# EAGLE board ThingPlus_Micromod-MiddleJig (EAGLE 9.6.2)

Size 104.14 x 35.56 mm. Coordinates in mm from the lower left corner, seen from the top.
Outline: 0,33.02 arc-80 2.54,35.56 101.6,35.56 arc-80 104.14,33.02 104.14,2.54 arc-80 101.6,0 2.54,0 arc-80 0,2.54 0,33.02
Outline: 12.83,8.25 15.37,8.25 15.37,20.95 20.7,20.95 20.7,28.83 10.92,28.83 10.92,20.07 6.98,20.07 6.98,15.49 10.67,15.49 10.67,11.43 12.83,11.43 12.83,8.25
Outline: 27.18,18.67 36.45,18.67 36.45,14.22 27.18,14.22 27.18,18.67
Outline: 45.47,23.88 51.69,23.88 51.69,19.3 45.47,19.3 45.47,23.88
Outline: 89.92,23.49 92.71,23.49 92.71,19.69 89.92,19.69 89.92,6.86 74.04,6.86 74.04,24.38 69.72,24.38 69.72,27.43 74.04,27.43 74.04,31.88 89.92,31.88 89.92,23.49
Copper layers (1*16): Top 0.035mm / dielectric 1.5mm / Bottom 0.035mm
Design rules "SparkFun-2-Layer-General-JLCPCB": minimum track width 7mil, minimum drill 0.3mm, track to track 7mil, track to pad 7mil, pad to pad 7mil, via to via 7mil, smd to smd 7mil, copper to edge 7mil, drill to drill 7mil, minimum pad ring 7mil, minimum via ring 7mil, stop-mask expansion 4mil, vias tented up to drill 25mil, thermal gap 10mil
Net classes: 0 default: width 0 mm, drill 0 mm; 1 power: width 0.457 mm
Holes 1.7 mm at 22.61,16.76 20.07,16.76 92.33,13.84 58.42,7.62 55.88,7.62 53.34,7.62 50.8,7.62 48.26,7.62 45.72,7.62 43.18,7.62 40.64,7.62 38.1,7.62 35.56,7.62 33.02,7.62 30.48,7.62 27.94,7.62 22.86,7.62 20.32,7.62 58.42,27.94 55.88,27.94 53.34,27.94 50.8,27.94 48.26,27.94 45.72,27.94 43.18,27.94 40.64,27.94 38.1,27.94 35.56,27.94 33.02,27.94 30.48,27.94 7.6,22.1 7.6,13.46
Milling: area 7,8.3 to 20.7,28.8; area 27.2,14.2 to 36.4,18.7; area 45.5,19.3 to 51.7,23.9; area 69.7,6.9 to 92.7,27.4; area 74,27.4 to 89.9,31.9

## Footprints (pad centres in the part's own frame; a part is rotated, then mirrored left to right if it is on the bottom)
STAND-OFF-TIGHT = hole 3.048: 0,0
NUBBIN_LOCKER = hole 2.794: 0,0
STAND-OFF = hole 3.302: 0,0

## Placement (x,y rotation side)
E$1  [STAND-OFF-TIGHT]  3.17,6.35 0 top
E$2  [STAND-OFF-TIGHT]  3.17,29.21 0 top
E$3  [STAND-OFF-TIGHT]  100.96,6.35 0 top
E$4  [STAND-OFF-TIGHT]  100.96,29.21 0 top
E$5  [NUBBIN_LOCKER]  52.07,2.03 0 top
E$6  [NUBBIN_LOCKER]  52.07,33.53 0 top
FRAME1  FRAME-LEDGER  [CREATIVE_COMMONS]  28.19,37.85 0 top
H1  STAND-OFF  [STAND-OFF]  8.89,26.67 0 top
H2  STAND-OFF  [STAND-OFF]  62.23,26.67 0 top
H3  STAND-OFF  [STAND-OFF]  62.23,8.89 0 top
H4  STAND-OFF  [STAND-OFF]  8.89,8.89 0 top

## Library data of the parts
E$1-E$6 H1-H4 = SparkFun-Hardware
FRAME1 = SparkFun-Aesthetics; DESIGNER: Ricardo R.

## Tracks (layer width: path | path; a pad name or v marks a point on that pad's centre or on a via)
(copper drawn outside any net)
  shapes: Top area x1

## Text on the board
Top: Up-MiddleLayer
Bottom: Down-MiddleLayer
tPlace: #88 | V11 | MicroMod Thing Plus | 18027
tDocu: Ricardo R.